# Altium PCB PCB_Bai1.PcbDoc
Units mil, origin at the board's own origin, x right, y up, seen from the top; angles counter-clockwise.
Board outline 7145.03 x 2265.03 mil, 2 copper layers (Top Layer, Bottom Layer); 41 components, 41 nets, 171 pads, 58 vias.
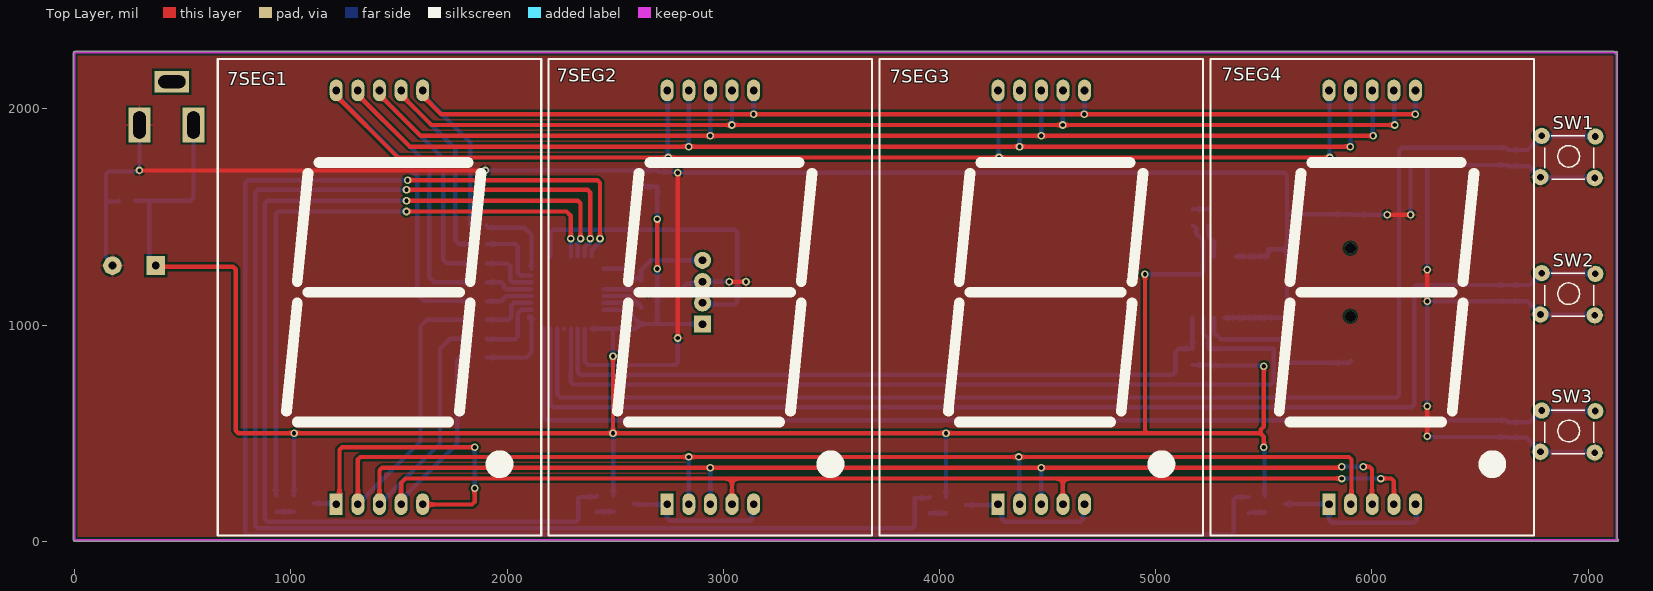
[diagram p0: Top Layer view]
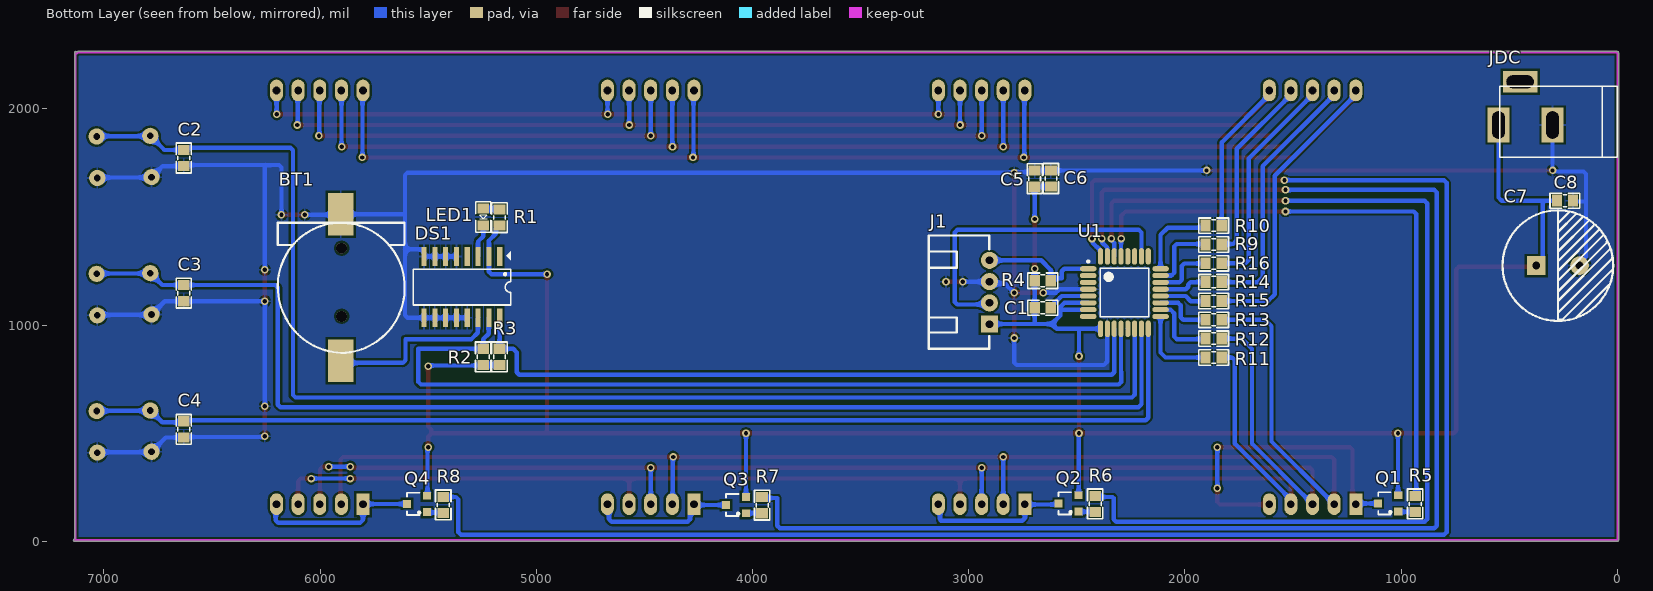
[diagram p1: Bottom Layer view, seen from below]
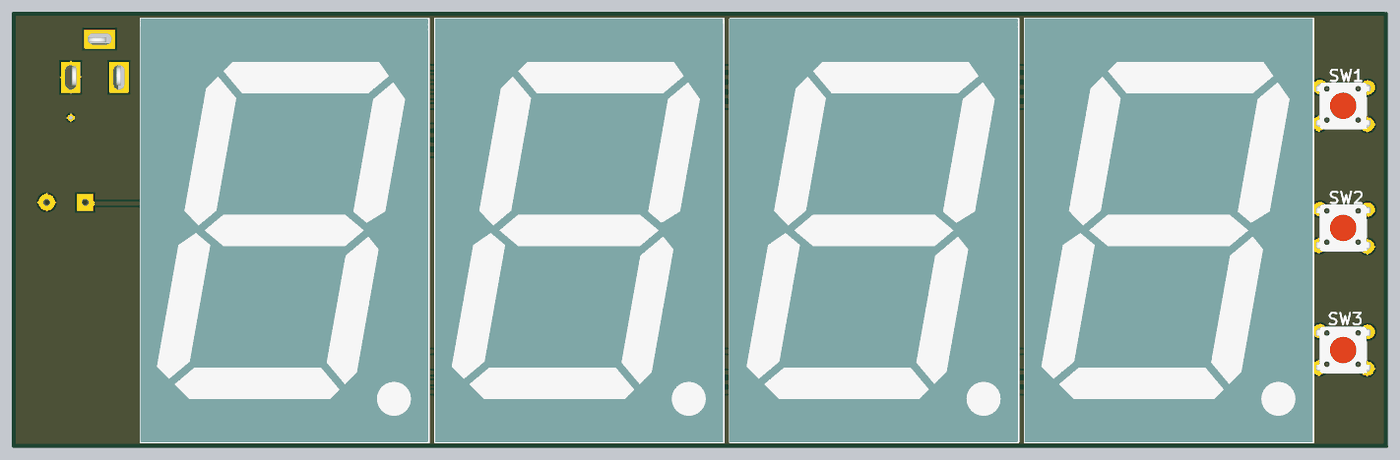
[diagram p2: 3D render of the assembled board from above, using the file's embedded part models]
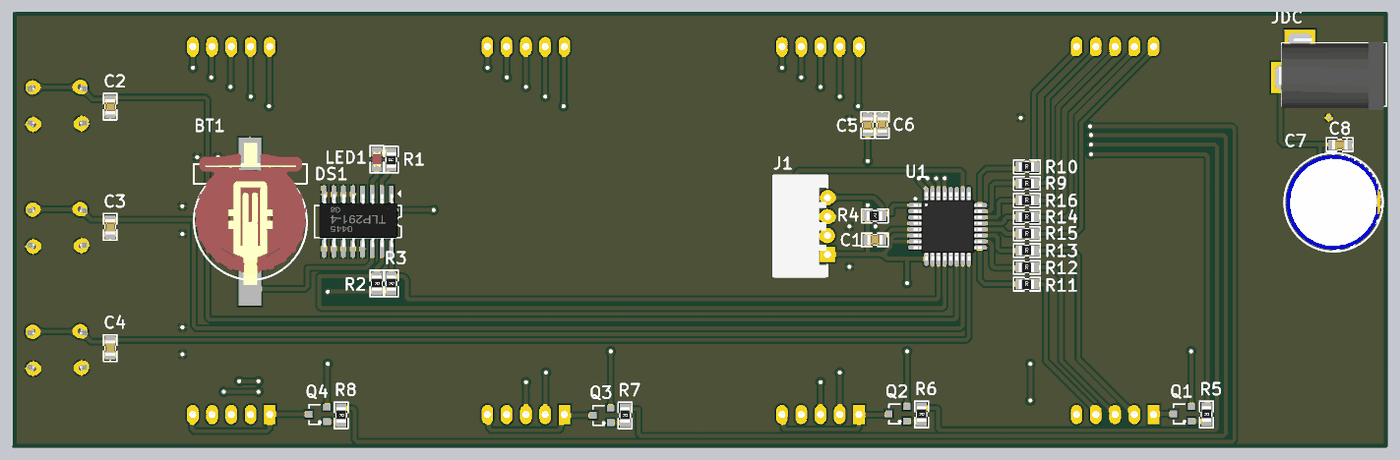
[diagram p3: 3D render of the assembled board from below, using the file's embedded part models]

## Layer stack, top to bottom
Top Solder: solder mask 0.4, Solder Resist, Dk 3.5
Top Layer: signal copper 1.4
Dielectric 1: dielectric 12.6, FR-4, Dk 4.8
Bottom Layer: signal copper 1.4
Bottom Solder: solder mask 0.4, Solder Resist, Dk 3.5

## Board outline
-5.01,5 -5.02,2235 -5.02,2260 cw(c0,2260) 0,2265.02 7120,2265.02 cw(c7120,2260) 7123.56,2263.53 7125,2262.09 7126.45,2263.55 cw(c7130,2260.01) 7135.01,2260 7135.01,12.08 7138.55,8.55 cw(c7135.03,5.01) 7140.01,5 cw(c7135,5) 7135,-0.01 0,-0.01 cw(c0,5)

## Design rules (kind name [scope] priority, off if disabled: settings)
Clearance [All] p1: gap=10 ignorepadtopadclearanceinfootprint=FALSE
PolygonConnect [All] p1: connectstyle=Relief reliefconductorwidth=10 reliefentries=4 polygonreliefangle="90 Angle" airgapwidth=10
RoutingVias [All] p1: holewidth=20 width=35 viastyle="Through Hole" minholewidth=15 minwidth=25 maxholewidth=28 maxwidth=50
SolderMaskExpansion [All] p1: expansion=4 istentingtop=FALSE
Width [All] p1: maxlimit=50 minlimit=10 preferedwidth=20
30 further rules are at their usual default settings.

## Components (designator, comment, footprint, x,y, rotation, side; value= is the part's Value field where it differs from the comment)
7SEG1 "Led 7 Thanh 2.3 Inch Anot" "LED 7 THANH X 1.8INCH" 657,20.61 r0 top locked value="LED 7S SEG"
7SEG2 "Led 7 Thanh 2.3 Inch Anot" "LED 7 THANH X 1.8INCH" 2187.41,20.61 r0 top locked value="LED 7S SEG"
7SEG3 "Led 7 Thanh 2.3 Inch Anot" "LED 7 THANH X 1.8INCH" 3717.81,20.61 r0 top locked value="LED 7S SEG"
7SEG4 "Led 7 Thanh 2.3 Inch Anot" "LED 7 THANH X 1.8INCH" 5248.22,20.61 r0 top locked value="LED 7S SEG"
BT1 "MH004292" "DE PINCR1220" 5608.66,1473.11 r0 bottom
C1 "105" "tu 0805" 2657.43,1079.87 r0 bottom
C2 "104" "tu 0805" 6629.87,1772.57 r270 bottom
C3 "104" "tu 0805" 6629.87,1147.57 r270 bottom
C4 "104" "tu 0805" 6629.87,517.57 r270 bottom
C5 "106" "Tu 0805" 2694.87,1677.57 r270 bottom
C6 "104" "tu 0805" 2619.87,1677.77 r270 bottom
C7 "1000uF" "tu hoa 13mm" 275,1275 r180 bottom
C8 "106" "Tu 0805" 242.77,1575.13 r180 bottom
DS1 "DS 3231" SOP16 5343.94,1175.31 r0 bottom
J1 "Header 1_2.54_4P" "Header_Duc Cong_4P 2.54" 2905,1005 r0 bottom
JDC "Jack DC5.5x2.1" DC-IN 425,2025 r0 bottom
LED1 "Đỏ" "led 0805" 5243,1499.54 r270 bottom
Q1 "A1015" SOT23 1060,175 r90 bottom
Q2 "A1015" SOT23 2538.74,175 r90 bottom
Q3 "A1015" SOT23 4076.26,167.6 r90 bottom
Q4 "A1015" SOT23 5551.26,172.6 r90 bottom
R1 "470R" "Tro SMD 0805" 5172.39,1497.23 r90 bottom
R2 "4.7k" "tro smd 0805" 5242.61,852.77 r270 bottom
R3 "4.7k" "tro smd 0805" 5167.61,852.77 r270 bottom
R4 "10k" "tro smd 0805" 2657.77,1207.39 r180 bottom
R5 "1k" "tro smd 0805" 932.61,172.57 r270 bottom
R6 "1k" "tro smd 0805" 2412.61,172.77 r270 bottom
R7 "1k" "tro smd 0805" 3952.61,167.57 r270 bottom
R8 "1k" "tro smd 0805" 5427.61,167.77 r270 bottom
R9 "100R" "tro smd 0805" 1867.77,1375.25 r180 bottom
R10 "100R" "tro smd 0805" 1867.77,1462.39 r180 bottom
R11 "100R" "tro smd 0805" 1867.77,852.39 r180 bottom
R12 "100R" "tro smd 0805" 1867.77,939.53 r180 bottom
R13 "100R" "tro smd 0805" 1867.77,1026.68 r180 bottom
R14 "100R" "tro smd 0805" 1867.77,1200.96 r180 bottom
R15 "100R" "tro smd 0805" 1867.77,1113.82 r180 bottom
R16 "100R" "tro smd 0805" 1867.77,1288.11 r180 bottom
SW1 "Nut Nhan 4 Chan" SW4 6785,1875 r0 top value="Nút Nhấn 4 Chân 6x6x9MM DIP"
SW2 "Nut Nhan 4 Chan" SW4 6785,1240 r0 top value="Nút Nhấn 4 Chân 6x6x9MM DIP"
SW3 "Nut Nhan 4 Chan" SW4 6785,605 r0 top value="Nút Nhấn 4 Chân 6x6x9MM DIP"
U1 "MH" 32A_M 2280,1150 r180 bottom value=STM8S005K6T6C

## Footprints (in the part's own frame and the unit in brackets; to place one, negate y for a bottom-side part, rotate by r counter-clockwise, add the part's x,y. Pads: shape width x height; smd on the part's side, far side on the other; paste and mask are expansions set on the pad)
32A_M [mm] "Thin QFP, 32-Leads, Body 7x7mm, Pitch 0.8mm, IPC Low Density"
  oval 1.95x0.6 smd: 1(-4.25,2.8) 2(-4.25,2) 3(-4.25,1.2) 4(-4.25,0.4) 5(-4.25,-0.4) 6(-4.25,-1.2) 7(-4.25,-2) 8(-4.25,-2.8) 17(4.25,-2.8) 18(4.25,-2) 19(4.25,-1.2) 20(4.25,-0.4) 21(4.25,0.4) 22(4.25,1.2) 23(4.25,2) 24(4.25,2.8)
  oval 0.6x1.95 smd: 9(-2.8,-4.25) 10(-2,-4.25) 11(-1.2,-4.25) 12(-0.4,-4.25) 13(0.4,-4.25) 14(1.2,-4.25) 15(2,-4.25) 16(2.8,-4.25) 25(2.8,4.25) 26(2,4.25) 27(1.2,4.25) 28(0.4,4.25) 29(-0.4,4.25) 30(-1.2,4.25) 31(-2,4.25) 32(-2.8,4.25)
  silkscreen extent -4.38,-2.85 2.85,3.77, body extent -4.49,-4.52 4.54,4.52, height 1.61
DC-IN [mil] "Jac DC input"
  rect 100x160 hole 59.06 slot 125.98 at 90 deg: 1(125,100) 2(-125,100)
  rect 160x100 hole 59.06 slot 125.98 at 0 deg: 3(25,-100)
  silkscreen extent -425,-80 120,250, body extent -410,-105 134,269, height 434
"DE PINCR1220" [mm]
  rect 3x5 smd: 1(7.5,-1) 2(7.5,16.2)
  silkscreen extent 0,0 14.9,15.3, body extent 0.04,-2.82 14.79,15.98, height 4.76
"Header_Duc Cong_4P 2.54" [mil]
  rect 78.74x78.74 hole 35: 1(-1,1)
  round 78.74 hole 35: 2(-1,-97.43) 3(-1,-195.85) 4(-1,-294.28)
  silkscreen extent 0,-409 280,115, body extent 5,-413 278,122, height 290
"LED 7 THANH X 1.8INCH" [mil]
  rect 60x100 hole 35.43: 1(553,151)
  oval 60x100 hole 35.43: 2(653,151) 3(753,151) 4(853,151) 5(953,151) 6(953,2064.39) 7(853,2064.39) 8(753,2064.39) 9(653,2064.39) 10(553,2064.39)
  silkscreen extent 5,5 1501,2210, body extent 3,6 1499,2211, height 435
"led 0805" [mm]
  rect 1.2x1.4 smd: 1(-0.996,-0.051) 2(1.004,-0.051)
  silkscreen extent -1.78,-0.94 1.8,0.84, body extent -0.98,-0.65 1.04,0.6, height 1.1
SOP16 [mm] "Small Outline; 16 Leads; Body Width 5.6 mm; Pitch 1.27 mm"
  rect 0.6x2.2 smd: 1(-4.445,-3.6) 2(-3.175,-3.6) 3(-1.905,-3.6) 4(-0.635,-3.6) 5(0.635,-3.6) 6(1.905,-3.6) 7(3.175,-3.6) 8(4.445,-3.6) 9(4.445,3.6) 10(3.175,3.6) 11(1.905,3.6) 12(0.635,3.6) 13(-0.635,3.6) 14(-1.905,3.6) 15(-3.175,3.6) 16(-4.445,3.6)
  silkscreen extent -5.73,-4.19 5.72,2.1, body extent -5.22,-3.63 5.08,3.37, height 2.1
SOT23 [mm] "SOT-23; 3 Leads; Body 3.1 x 2.5 mm, inc. leads (LxW max), Alternate Lead Configuration"
  rect 0.9x0.95 smd: 1(-0.95,-1.175) 2(0,1.175) 3(0.95,-1.175)
  silkscreen extent -1.3,-0.38 1.3,1.18
SW4 [mil] "SW button 4pin, 250 x250 mil"
  round 75 hole 31: 1(0,0) 2(245,-195) 3(248,-3) 4(-6,-191)
  silkscreen extent 15,-215 240,0, body extent -36,-220 276,24, height 276
"Tro SMD 0805" [mm]
  rect 1.2x1.4 smd: 1(-0.946,-0.061) 2(0.954,-0.061)
  silkscreen extent -1.75,-0.97 1.75,0.84, body extent -1.56,-0.76 1.44,0.64, height 0.53
"tro smd 0805" [mm]
  rect 1.2x1.4 smd: 1(-0.946,-0.061) 2(0.954,-0.061)
  silkscreen extent -1.75,-0.97 1.75,0.84, body extent -1.56,-0.76 1.44,0.64, height 0.53
"tu 0805" [mm] "Compoment SMD 80x50mil"
  rect 1.2x1.4 smd: 1(-0.946,-0.003) 2(0.954,-0.003)
  silkscreen extent -1.75,-0.89 1.75,0.89, body extent -1.01,-0.64 1.01,0.63, height 0.61
"Tu 0805" [mm] "Compoment SMD 80x50mil"
  rect 1.2x1.4 smd: 1(-0.946,-0.003) 2(0.954,-0.003)
  silkscreen extent -1.75,-0.89 1.75,0.89, body extent -1.01,-0.64 1.01,0.63, height 0.61
"tu hoa 13mm" [mm]
  rect 2.2x2.2 hole 0.9: 1(-2.54,0)
  round 2.2 hole 0.9: 2(2.54,0)
  silkscreen extent -6.5,-6.5 6.5,6.5, body extent -6.25,-6.25 6.26,6.25, height 23.02

## Part data
7SEG1 7SEG2 7SEG3 7SEG4: library part "LED 7SEG 2.3Inch", "Single 7 Seg Dipslay 29x41 mm"
BT1: library part "De Pin 3.3V", "Dán", LatestRevisionDate="Đế Pin CR2032 SMD003"
C1: library part "Tu 0805 105 50V 10%", "Dán", Chung_Loai=Dán, Don_Vi=Con, Ma_Hang=MH004552, So_Chan=2, Ten_Linh_Kien="Tụ 0805 105-1uF 10% 50V"
C2 C3 C4 C6: library part "Tu 0805 104 50V 10%", "Dán", Chung_Loai=Dán, Don_Vi=Con, Ma_Hang=MH004551, So_Chan=2, Ten_Linh_Kien="Tụ 0805 104-100nF 10% 50V"
C5 C8: library part "Tu 0805 106 16V 10%", "Dán", Chung_Loai=Dán, Don_Vi=Con, Ma_Hang=MH004553, So_Chan=2, Ten_Linh_Kien="Tụ 0805 106-10uF 10% 16V"
C7: library part "Tu Hoa 1000uF 25V 13x21", "Cắm", Chung_Loai=Cắm, Don_Vi=Con, Ma_Hang=MH002315, So_Chan=2, Ten_Linh_Kien="Tụ Hóa 1000uF 25V 13x21MM"
DS1 Q1 Q2 Q3 Q4: "Dán", Chung_Loai=Dán, Don_Vi=Con
  DS1: Ma_Hang=MH002604, Ten_Linh_Kien="DS3231N SOIC16"
  Q1 Q2 Q3 Q4: Ma_Hang=MH001957, Ten_Linh_Kien="A1015 SOT23 TRANS PNP 0.15A 50V ( SMD-BA)"
J1 SW1 SW2 SW3: "Cắm"
  J1: Chung_Loai=Cắm
  SW1 SW2 SW3: Don_Vi=Con, Ma_Hang=MH004077
JDC: library part Jac_DC, "Cắm", Chung_Loai=Cắm, Don_Vi=Con, Ma_Hang=MH000923, Ten_Linh_Kien="Jack DC5.5x2.1MM DC5501"
LED1: library part "LED 0805", "Dán", Chung_Loai=Cắm, Don_Vi=Con
R1: library part "Tro 0805 5% 470R", "Dán", Chung_Loai=Dán, Don_Vi=Con, Ma_Hang=MH005341, So_Chan=2, Ten_Linh_Kien="Trở 0805 5% 470R"
R2 R3: library part "Tro 0805 5% 4.7k", "Dán", Chung_Loai=Dán, Don_Vi=Con, Ma_Hang=MH005307, So_Chan=2, Ten_Linh_Kien="Trở 0805 5% 4.7k"
R4: library part "Tro 0805 1% 10k", "Dán", Chung_Loai=Dán, Don_Vi=Con, Ma_Hang=MH005473, So_Chan=2, Ten_Linh_Kien="Trở 0805 1% 10k"
R5: library part "Tro 0805 5% 1k", "Dán", Chung_Loai=Dán, Don_Vi=Con, Ma_Hang=MH005234, So_Chan=2, Ten_Linh_Kien="Trở 0805 5% 1k"
R6 R7 R8: library part "Tro 0805 1% 1k", "Dán", Chung_Loai=Dán, Don_Vi=Con, Ma_Hang=MH005468, So_Chan=2, Ten_Linh_Kien="Trở 0805 1% 1k"
R9 R10 R11 R12 R13 R14 R15 R16: library part "Tro 0805 5% 100R", "Dán", Chung_Loai=Dán, Don_Vi=Con, Ma_Hang=MH005251, So_Chan=2, Ten_Linh_Kien="Trở 0805 5% 100R"
U1: library part STM8S005K6T6C, "Dán"

## Via types
v1: diameter 35, hole 20, Top Layer to Bottom Layer, tented both sides, 55 vias
v2: diameter 50, hole 50, Top Layer to Bottom Layer, tented both sides, 2 vias
v3: diameter 35, hole 20, Top Layer to Bottom Layer, 1 vias

## Nets (pads, with @x,y where several pads share a name; then routed paths per layer and width w, separated by ;. In a path a pad name is that pad's centre, name@x,y a point inside that pad or via, vN(x,y) a via of type N, cw(c..) or ccw(c..) an arc to the next point about the centre after c; other vN are vias at no path point)
5V: C1.2 C5.2 C6.2 C7.1 C8.1 DS1.2 J1.1 JDC.1 Q1.3 Q2.3 Q3.3 Q4.3 R1.1 R2.2 R3.2 R4.1 U1.6 U1.7 U1.9 | length 11930.7
  Top Layer w20: C7.1 380,1270 733.28,1270 745,1258.28 745,511.72 756.72,500 v1(1015,500) v1(2490,500) ; v1(2490,855) v1(2490,500) ; v1(2695,1260) v1(2695,1490) ; v1(4950,1235) 4950,511.72 4961.72,500 ; v1(5500,435) 5500,483.62 5483.62,500 ; v1(5500,810) 5500,530.34 5485,515.34 5485,505 5483.62,503.62 5483.62,500 ; v1(2490,500) v1(4030,500) 4961.72,500 ; 4961.72,500 5483.62,500
  Bottom Layer w20: C8.1 335,1575 ; C7.1 345,1305 345,1565 335,1575 ; JDC.1 550,1590 535,1575 345,1575 335,1575 ; Q1.3 1014.37,213.03 1014.37,499.37 v1(1015,500) ; U1.9 2491.82,982.68 ; U1.7 2575.31,1071.26 2576.57,1070 ; U1.6 2557.24,1102.76 2576.57,1083.43 2576.57,1070 ; v1(2490,500) 2491.24,498.76 2491.24,213.64 Q2.3 ; v1(2490,855) 2490,980.86 2491.82,982.68 ; C6.2 2620.1,1640.1 2694.9,1640.1 C5.2 v1(2695,1490) ; 2695,1016.72 C1.2 R4.1 v1(2695,1260) ; J1.1 2903,1005 2615.73,1005 ; Q3.3 v1(4030,500) ; v1(4950,1235) 5207.22,1235 5218.94,1246.72 DS1.2 5218.94,1390.35 5187.56,1421.73 5187.56,1446.38 5173.94,1460 R1.1 ; R3.2 R2.2 5247.6,812.6 5497.4,812.6 v1(5500,810) ; v1(5500,435) 5502.5,432.5 5502.5,212.5 Q4.3 ; 2491.82,982.68 2593.41,982.68 2615.73,1005 ; 2576.57,1070 2576.57,1044.16 2615.73,1005
GND: BT1.1 C2.2 C3.2 C4.2 C5.1 C6.1 C7.2 C8.2 DS1.5 DS1.6 DS1.7 DS1.8 DS1.9 DS1.10 DS1.11 DS1.12 DS1.13 J1.3 JDC.2 SW1.2 SW1.4 SW2.2 SW2.4 SW3.2 SW3.4 U1.4 U1.10 | length 14094.5
  Top Layer w20: v3(300,1715) 590,1715 v1(1900,1715) ; v1(2655,1150) v1(2790,1150) ; v1(2790,940) v1(2790,1150) ; v1(2790,1705) v1(2790,1150) ; v1(3027.5,1200) v1(3105,1200) v1@3105,1190 ; v1(6070,1510) v1(6178.28,1510) ; v1(6255,485) v1(6255,625) ; v1(6255,1110) v1(6255,1255)
  Bottom Layer w20: C7.2 175,1285 145,1315 145,1566.06 ; C8.2 201.26,1571.06 150,1571.06 145,1566.06 ; v3@288.28,1710 156.72,1710 145,1698.28 145,1566.06 ; v3(300,1715) JDC.2 ; v1(1900,1715) C6.1 2620.1,1714.9 2694.9,1714.9 C5.1 2701.93,1707.87 2787.13,1707.87 v1(2790,1705) 5595.04,1705 5606.75,1693.28 5606.75,1510 ; U1.10 2359.06,982.36 2359.06,830.94 2375,815 2778.28,815 2790,826.72 v1(2790,940) ; U1.4 2579.98,1165.75 2589.89,1155.84 2590.72,1155.84 2596.56,1150 v1(2655,1150) ; v1(2790,1150) 2830.57,1190.57 2889.57,1190.57 2901.93,1202.93 J1.3 2904.43,1200.43 3027.07,1200.43 v1(3027.5,1200) ; DS1.13 DS1.12 DS1.11 DS1.10 DS1.9 5595.04,1033.58 5606.75,1045.3 5606.75,1350.35 ; DS1.5 DS1.6 DS1.7 DS1.8 5518.94,1348.54 5520.75,1350.35 5606.75,1350.35 ; v1(6070,1510) 5906.42,1510 BT1.1 5609.23,1512.48 5606.75,1510 ; v1(6178.28,1510) 6178.28,1728.28 6190,1740 6250,1740 ; v1(6255,485) 6257.5,482.5 6622.5,482.5 6627.5,477.5 C4.2 6713,480 SW3.4 6781,412 7028,412 SW3.2 ; v1(6255,625) v1(6255,1110) C3.2 6718,1110 SW2.4 6781,1047 7028,1047 SW2.2 ; v1(6255,1255) 6255,1735 6250,1740 ; SW1.2 7028,1682 6781,1682 SW1.4 6728,1735 C2.2 6625,1740 6250,1740 ; 5606.75,1350.35 5606.75,1510
I2C_SCL: DS1.15 R2.1 U1.12 | length 4113.8
  Bottom Layer w20: U1.12 2295.75,784.25 2295,783.5 2295,736.72 2306.72,725 5533.28,725 5545,736.72 5545,890.13 ; DS1.15 5220,1032.52 5220,960 5245,935 R2.1 5545,890
I2C_SDA: DS1.16 R3.1 U1.11 | length 3294.9
  Bottom Layer w20: U1.11 2327.24,781.72 2338.96,770 5078.28,770 5090,781.72 5090,873.28 5106.72,890 5168.94,890 5169.47,890.53 5169.47,1033.05 DS1.16
Led7_1: R5.1 U1.29 | length 2871.7
  Top Layer w20: v1(1535,1525) 2275,1525 2295,1505 v1(2295,1400)
  Bottom Layer w20: R5.1 930,214.8 930,1513.28 941.72,1525 v1(1535,1525) ; v1(2295,1400) 2295.75,1399.25 U1.29
Led7_2: R6.1 U1.30 | length 4829.7
  Top Layer w20: v1(1535,1575) 2328.28,1575 2340,1563.28 v1(2340,1400)
  Bottom Layer w20: v1(1535,1575) 891.72,1575 880,1563.28 880,101.72 891.72,90 2318.28,90 2330,101.72 2330,200 2335,205 2410,205 R6.1 ; U1.30 2327.24,1379.21 2337.13,1389.1 2337.13,1397.13 v1(2340,1400)
Led7_3: R7.1 U1.31 | length 6668.1
  Top Layer w20: v1(1535,1625) 2373.28,1625 2385,1613.28 v1(2385,1400)
  Bottom Layer w20: v1(1535,1625) 846.72,1625 835,1613.28 835,71.72 846.72,60 3873.28,60 3885,71.72 3885,200 3950.2,200 R7.1 ; U1.31 2358.74,1357.39 2382.13,1380.78 2382.13,1397.13 v1(2385,1400)
Led7_4: R8.1 U1.32 | length 8430
  Top Layer w20: v1(1540,1670) 2418.28,1670 2430,1658.28 v1(2430,1400)
  Bottom Layer w20: v1(1540,1670) 801.72,1670 790,1658.28 790,41.72 801.72,30 5348.28,30 5360,41.72 5360,193.28 5371.72,205 R8.1 ; U1.32 2390.24,1339.76 2390,1340 2390,1343.66 2427.13,1380.79 2427.13,1397.13 v1(2430,1400)
Led7_A: R9.1 U1.23 | length 340.7
  Bottom Layer w20: R9.1 1907.14,1375 2038.28,1375 2050,1363.28 2050,1241.15 2061.72,1229.43 2111.98,1229.43 U1.23
Led7_B: R10.1 U1.24 | length 382.4
  Bottom Layer w20: R10.1 1915,1450 2080,1450 2112.68,1417.32 U1.24
Led7_C: R11.1 U1.17 | length 397.5
  Bottom Layer w20: R11.1 2090,850 2112.68,872.68 U1.17 2101.67,1039.76 U1.17@2100,1038.09
Led7_D: R12.1 U1.18 | length 328.2
  Bottom Layer w20: R12.1 1907.14,935 2038.28,935 2050,946.72 2050,1054.54 2066.72,1071.26 U1.18
Led7_E: R13.1 U1.19 | length 272.4
  Bottom Layer w20: R13.1 2008.28,1024.28 2020,1036 2020,1091.04 2031.72,1102.76 U1.19
Led7_F: R14.1 U1.21 | length 226.8
  Bottom Layer w20: R14.1 1973.28,1198.57 1985,1186.85 1985,1177.46 1996.72,1165.75 U1.21
Led7_G: R15.1 U1.20 | length 218.8
  Bottom Layer w20: R15.1 1906.43,1110 1973.28,1110 1985,1121.72 1985,1122.54 1996.72,1134.25 U1.20
Led7_H: R16.1 U1.22 | length 282
  Bottom Layer w20: R16.1 1905.71,1285 2003.28,1285 2015,1273.28 2015,1208.96 2026.72,1197.24 U1.22
Net7SEG1_1: 7SEG1.1 7SEG1.5 Q1.2 | length 1491.7
  Top Layer w20: 7SEG1.1 1225,186.61 1225,423.28 1236.72,435 v1(1850,435) ; 7SEG1.5 1611.61,170 1838.28,170 1850,181.72 v1(1850,245)
  Bottom Layer w20: Q1.2 1206.61,175 7SEG1.1 ; v1(1850,245) v1(1850,435)
Net7SEG1_2: 7SEG1.2 7SEG2.2 7SEG3.2 7SEG4.2 R13.2 | length 6649.5
  Top Layer w20: 7SEG1.2 1310,378.28 1321.72,390 v1(2840,390) v1(4366.64,390) 5893.28,390 5905,378.28 5905,175.39 7SEG4.2
  Bottom Layer w20: 7SEG1.2 1310,180.79 1328.48,199.27 1337.65,199.27 1600,461.61 1600,995 1629.28,1024.28 R13.2 ; v1(2840,390) 2840.2,389.8 2840.2,171.82 7SEG2.2 ; v1(4366.64,390) 4368.73,387.91 4368.73,173.7 7SEG3.2
Net7SEG1_3: 7SEG1.3 7SEG2.3 7SEG3.3 7SEG4.3 R12.2 | length 6257.4
  Top Layer w20: 7SEG1.3 1410,328.28 1421.72,340 v1(2940,340) v1(4470,340) 5844.39,340 5846.52,342.13 5857.13,342.13 v1(5860,345) ; v1(5960,345) 5988.28,345 6000,333.28 6000,172.83 7SEG4.3
  Bottom Layer w20: 7SEG1.3 1410,180.79 1428.48,199.27 1437.65,199.27 1690,451.61 1690,890 1737.14,937.14 R12.2 ; v1(2940,340) 2940.2,339.8 2940.2,171.82 7SEG2.3 ; v1(4470,340) 4470.41,339.59 4470.41,172.02 7SEG3.3 ; v1(5860,345) v1(5960,345)
Net7SEG1_4: 7SEG1.4 7SEG2.4 7SEG3.4 7SEG4.4 R11.2 | length 5886.1
  Top Layer w20: 7SEG1.4 1510,270 1530,290 3040,290 ; 7SEG2.4 3040.41,174.59 3040,175 3040,290 ; 7SEG3.4 4570,172.43 4570,290 ; v1(5860,290) 4570,290 ; v1(6040,290) 6089.5,290 6101.22,278.28 7SEG4.4 ; 3040,290 4570,290
  Bottom Layer w20: 7SEG1.4 1510,191.61 1770,451.61 1770,838.28 1781.72,850 R11.2 ; v1(5860,290) v1(6040,290)
Net7SEG1_6: 7SEG1.6 7SEG2.6 7SEG3.6 7SEG4.6 R10.2 | length 5698.6
  Top Layer w20: 7SEG1.6 1610,2060 1695,1975 v1(3140,1975) v1(4670,1975) ; v1@4670.41,1975.41 v1(4670,1975) ; 7SEG3.6@4670.41,2084.59 7SEG3.6 ; v1(6200,1975) v1(4670,1975)
  Bottom Layer w20: 7SEG1.6 1610,2065 1830.2,1844.8 R10.2 ; v1(3140,1975) 3140.2,1975.2 3140.2,2084.8 7SEG2.6 ; v1(4670,1975) 4670.41,1975.41 4670.41,2084.59 7SEG3.6 ; v1(6200,1975) 6200.61,1975.61 6200.61,2084.39 7SEG4.6
Net7SEG1_7: 7SEG1.7 7SEG2.7 7SEG3.7 7SEG4.7 R9.2 | length 6029.9
  Top Layer w20: 7SEG1.7 1510,2065 1650,1925 v1(3040,1925) v1(4570,1925) v1(6105,1925)
  Bottom Layer w20: 7SEG1.7 1510,2065 1760,1815 1760,1391.72 1776.57,1375.14 1827.91,1375.14 R9.2 ; v1(3040,1925) 3040.2,1925.2 3040.2,2084.8 7SEG2.7 ; v1(4570,1925) 4570.41,1925.41 4570.41,2084.59 7SEG3.7 ; 7SEG4.7 6103.11,2083.11 6103.11,1926.89 v1(6105,1925)
Net7SEG1_8: 7SEG1.8 7SEG2.8 7SEG3.8 7SEG4.8 R16.2 | length 6363.1
  Top Layer w20: 7SEG1.8 1410,2065 1600,1875 v1(2940,1875) v1(4470,1875) v1(6005,1875)
  Bottom Layer w20: 7SEG1.8 1410,2065 1705,1770 1705,1301.72 1721,1285.71 R16.2 ; v1(2940,1875) 2940.2,1875.2 2940.2,2084.8 7SEG2.8 ; v1(4470,1875) 4470.41,1875.41 4470.41,2084.59 7SEG3.8 ; 7SEG4.8 6003.11,2083.11 6003.11,1876.89 v1(6005,1875)
Net7SEG1_9: 7SEG1.9 7SEG2.9 7SEG3.9 7SEG4.9 R14.2 | length 6690.2
  Top Layer w20: 7SEG1.9 1310,2065 1550,1825 v1(2840,1825) v1(4370,1825) v1(5900,1825)
  Bottom Layer w20: 7SEG1.9 1310,2065 1640,1735 1640,1221.72 1663.15,1198.57 R14.2 ; v1(2840,1825) 2840.2,1825.2 2840.2,2084.8 7SEG2.9 ; v1(4370,1825) 4370.41,1825.41 4370.41,2084.59 7SEG3.9 ; v1(5900,1825) 5900.61,1825.61 5900.61,2084.39 7SEG4.9
Net7SEG1_10: 7SEG1.10 7SEG2.10 7SEG3.10 7SEG4.10 R15.2 | length 7029.6
  Top Layer w20: 7SEG1.10 1210,2060 1495,1775 v1(2745,1775) v1(4275,1775) v1(5805,1775)
  Bottom Layer w20: 7SEG1.10 1210,2065 1585,1690 1585,1141.72 1615.29,1111.43 R15.2 ; 7SEG2.10 2742.7,2082.7 2742.7,1777.3 v1(2745,1775) ; 7SEG3.10 4272.91,2082.91 4272.91,1777.09 v1(4275,1775) ; 7SEG4.10 5803.11,2083.11 5803.11,1776.89 v1(5805,1775)
Net7SEG2_1: 7SEG2.1 7SEG2.5 Q2.2 | length 697.4
  Bottom Layer w20: Q2.2 2590,170 2738.79,170 7SEG2.1 2740.41,106.72 2752.12,95 3128.28,95 3132.75,99.47 3132.75,163.96 7SEG2.5
Net7SEG3_1: 7SEG3.1 7SEG3.5 Q3.2 | length 684.7
  Bottom Layer w20: Q3.2 4266.8,167.6 7SEG3.1 4288.34,154.09 4288.34,101.72 4300.06,90 4651.44,90 4663.16,101.72 4663.16,163.96 7SEG3.5
Net7SEG4_1: 7SEG4.1 7SEG4.5 Q4.2 | length 767.7
  Bottom Layer w20: Q4.2 5800.24,172.6 7SEG4.1 5801.22,98.78 5815,85 6193.28,85 6205,96.72 6205,167.83 7SEG4.5
NetBT1_2: BT1.2 DS1.14 | length 822.8
  Bottom Layer w20: DS1.14 5270.75,1031.77 5270.75,964.25 5300,935 5605,935 5605,836.72 5616.72,825 5893.62,825 BT1.2
NetC1_1: C1.1 U1.5 | length 197.7
  Bottom Layer w20: U1.5 2569.05,1134.25 2577.46,1125.84 2578.29,1125.84 2620.2,1083.94 C1.1
NetDS1_3: DS1.3 LED1.2 | length 152.9
  Bottom Layer w20: LED1.2 5245,1410 5268.94,1386.06 DS1.3
NetLED1_1: LED1.1 R1.2 | length 76.6
  Bottom Layer w20: R1.2 5171.97,1536.77 5243.03,1536.77 LED1.1
NetQ1_1: Q1.1 R5.2 | length 79.8
  Bottom Layer w20: R5.2 936.3,136.3 1012.44,136.3 Q1.1
NetQ2_1: Q2.1 R6.2 | length 78.5
  Bottom Layer w20: R6.2 2416.2,136.4 2491.28,136.4 Q2.1
NetQ3_1: Q3.1 R7.2 | length 75.1
  Bottom Layer w20: R7.2 3955.1,130.1 4029.9,130.1 Q3.1
NetQ4_1: Q4.1 R8.2 | length 77.1
  Bottom Layer w20: R8.2 5432.5,132.7 5502.5,132.7 Q4.1
Nut1: C2.1 SW1.1 SW1.3 U1.14 | length 6284.5
  Top Layer w20: SW1.1 SW1.1@6786.5,1873.5 ; SW1.3@7031.5,1873.5 SW1.3
  Bottom Layer w20: U1.14 2232.76,677.24 2245,665 6113.28,665 6125,676.72 6125,1808.28 6136.72,1820 6619.8,1820 C2.1 6719.8,1809.8 SW1.1 ; SW1.1@6786.5,1873.5 SW1.3@7031.5,1873.5
Nut2: C3.1 SW2.1 SW2.3 U1.15 | length 5761.8
  Bottom Layer w20: U1.15 2201.26,633.74 2215,620 6183.28,620 6195,631.72 6195,1173.28 6206.72,1185 6349.61,1185 6349.8,1184.8 C3.1 6729.8,1184.8 SW2.1 6786.5,1238.5 7031.5,1238.5 SW2.3
Nut3: C4.1 SW3.1 SW3.3 U1.16 | length 5307.2
  Bottom Layer w20: U1.16 2169.76,571.72 2181.48,560 6620.87,560 6630.87,550 6730,550 SW3.1 6786.5,603.5 7031.5,603.5 SW3.3
RST: J1.4 R4.2 U1.1 | length 566.6
  Bottom Layer w20: U1.1 2558.28,1260.24 2570,1248.52 2570,1216.72 2608.48,1216.72 R4.2 2620.2,1255.2 2664.28,1299.28 J1.4
SWIM: J1.2 U1.26 | length 1485.6
  Bottom Layer w20: U1.26 2201.26,1428.28 2212.98,1440 3053.28,1440 3065,1428.28 3065,1106.72 3053.28,1095 2911.43,1095 J1.2 J1.2@2911.58,1110
pads on no net: DS1.1 DS1.4 JDC.3 U1.2 U1.3 U1.8 U1.13 U1.25 U1.27 U1.28
copper on no net: | length 0.4
  Bottom Layer w20: 2264.25,982.68 2264.57,982.36
  other v2: 5900,1040.04 5900,1355

## Polygon pours and split planes (outlines as drawn)
GND on Top Layer "GND_L01_P006" (solid, remove dead copper, pour order 6): -15,2275 7125,2275 7145,2255 7145,-10 -5,-10 -15,0
GND on Bottom Layer "GND_L02_P007" (solid, remove dead copper, pour order 7): -5,2270 7130,2270 7130,15 7115,0 0,0

## Keep-outs
Keep-Out Layer:
  lines w10: 0,2235 0,2260 20,2260 7110,2260 7120,2260 7125,2255 7130,2260 7130,10 7135,5 0,5 0,2250